# Allegro board AIRQUALITYBLUETOOTHSENSOR.brd
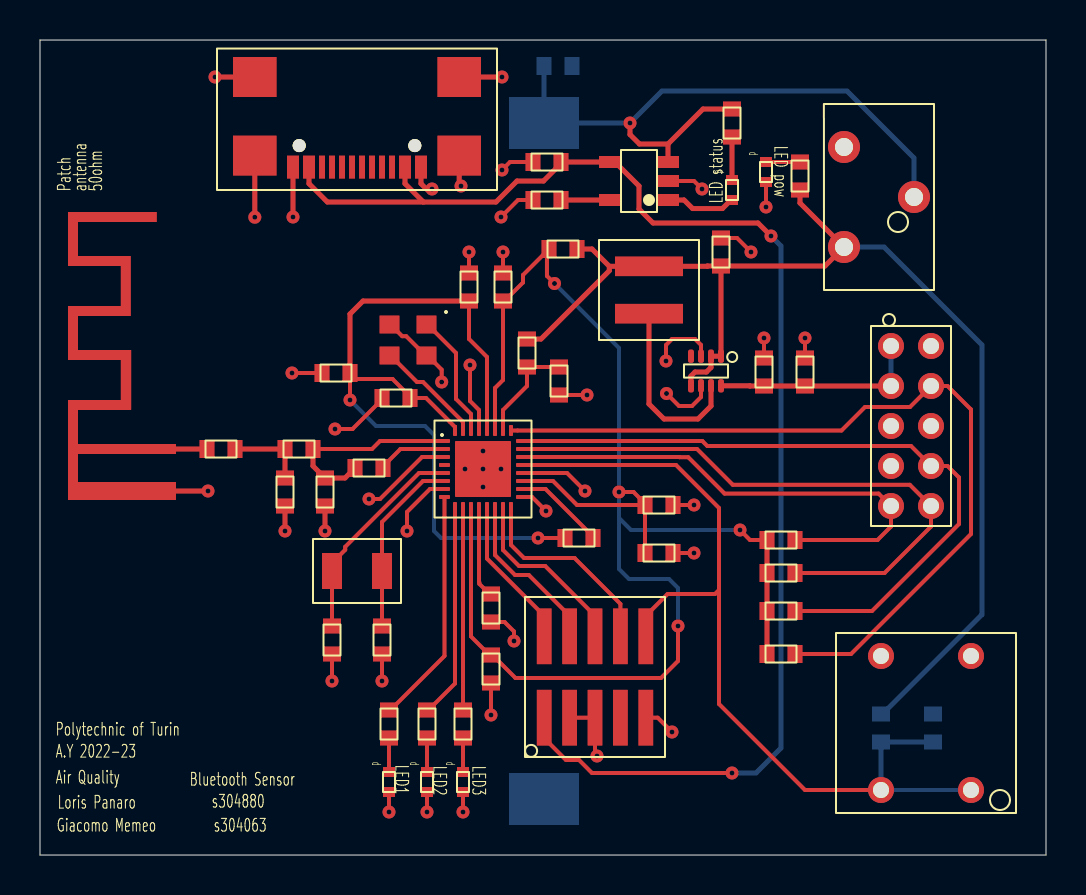
[diagram p0: board, top side]
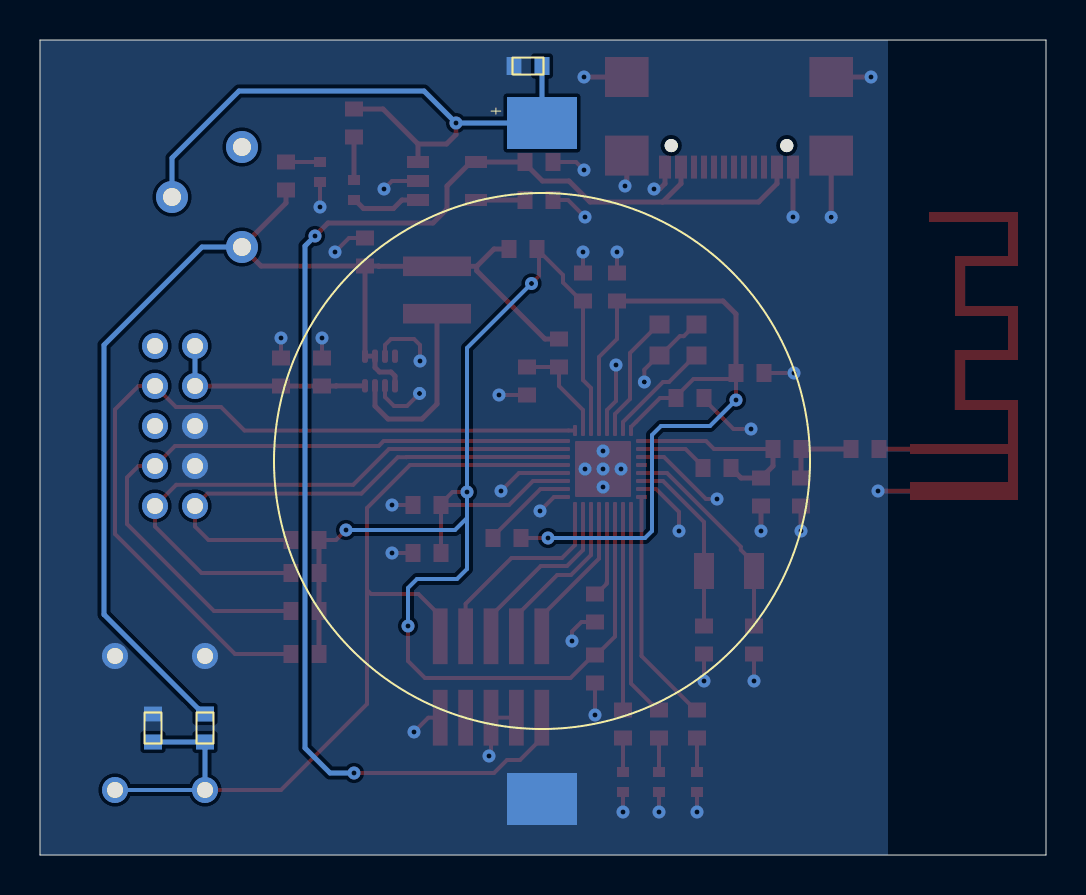
[diagram p1: board, bottom side, seen from below]

Outline 50.3 x 40.75 mm; copper layers: TOP, BOTTOM. Coordinates in mm from the lower left corner of the outline.
Outline path: 0,40.75 0,0 50.3,0 50.3,40.75 0,40.75

## Design rules (mm)
constraint set DEFAULT: min track width 0.127

## Placement (name value [footprint] x y rotation side)
C1  12pF  [0603C]  9.05 20.3 180 top
C2  1.2pF  [0603C]  14.25 18.15 90 top
C3  1.2pF  [0603C]  12.25 18.15 90 top
C4  1u  [0603C]  22.55 12.35 90 top
C5  12pF  [0603C]  14.6 10.75 90 top
C6  12pF  [0603C]  17.1 10.75 90 top
C7  47uF  [0603C]  38.25 24.15 270 top
C8  100nF  [0603C]  44.65 6.35 90 bottom
C9  5.6 uF  [0603C]  25.9 39.45 180 bottom
C10  10 uF  [0603C]  34.05 30.15 270 top
C11  22 uF  [0603C]  36.2 24.15 270 top
C12  5.6 uF  [0603C]  25.35 34.65 0 top
C13  100 nF  [0603C]  22.55 9.3 90 top
C14  100 nF  [0603C]  23.15 28.4 270 top
C15  10 uF  [0603C]  30.95 17.5 180 top
C16  100 nF  [0603C]  30.95 15.1 180 top
C17  10 uF  [0603C]  14.8 24.1 0 top
C18  100 nF  [0603C]  21.45 28.4 270 top
C19  100 nF  [0603C]  17.8 22.85 0 top
L1  15nH  [0603L]  16.45 19.35 180 top
L2  2nH  [0603L]  12.95 20.3 180 top
L3  1uH  [XGL4020]  30.45 28.25 270 top
L4  BLM18HE152SN1  [0603L]  26.15 30.3 180 top
L5  10 uH  [0603L]  26.95 15.85 180 top
R1  4.7k  [0603R]  17.45 6.55 90 top
R2  4.7k  [0603R]  19.35 6.55 90 top
R3  4.7k  [0603R]  21.15 6.55 90 top
R4  10k  [0603R]  37.05 15.75 180 top
R5  680k  [0603R]  24.35 25.1 90 top
R6  270k  [0603R]  25.95 23.7 90 top
R7  4.7k  [0603R]  38 33.95 270 top
R8  100k  [0603R]  42.05 6.35 270 bottom
R9  15 k  [0603R]  25.35 32.75 0 top
R10  470  [0603R]  34.6 36.6 90 top
RPU1  10k  [0603R]  37.05 14.1 0 top
RPU2  4.7k  [0603R]  37.05 12.2 0 top
RPU3  4.7k  [0603R]  37.05 10.05 180 top
U1  CC2640F128RSM  [MCU]  22.15 19.3 0 top
U2  an03  [PATCH_AN043]  6.3 17.75 90 top
U3  MCSJK-7E-24.00-8-10-60-B-10  [X24M]  18.4 25.75 180 top
U4  QTC332.76809B2R  [X32K]  15.85 14.2 0 top
U5  PMSA003I  [PM2_5]  43.55 21.45 270 top
U6  LED1  [SML]  17.45 3.65 90 top
U7  LED2  [SML]  19.35 3.65 90 top
U8  LED3  [SML]  21.15 3.65 90 top
U9  LPS-1301_9314_24  [LPS]  44.3 6.6 270 top
U10  FTSH-105-01-F-DV-K  [JTAG]  27.75 8.9 0 top
U11  LED_pow  [SML]  36.3 34.15 90 top
U12  SMTU2477N-LF  [LIR_NEW]  25.2 19.7 270 bottom
U13  -  [MCP73831]  29.95 33.7 90 top
U14  TPS61033  [TPS]  33.3 24.2 270 top
U15  USB4110-GF-A  [USB]  15.85 41.75 180 top
U16  LED_status  [SML]  34.6 33.25 90 top
U17  M12  [MS12]  41.95 32.9 270 top

## Library data of the parts
C1-C19 = C
L1-L5 = L
R1-R10 RPU1-RPU3 = R
U1 = CC2460F128RSM
U2 = ANTENNA
U3 = MCSJK-7E-24.00-8-10-60-B-10
U4 = QTC33276809B2R_0
U5 = PMSA003I
U6-U8 U11 U16 = SML-P11
U9 = LPS-1301_9314_24
U10 = FTSH-105-01-F-DV-K
U12 = SMTU2477N-LF
U13 = MCP73831_0
U14 = TPS61033_1
U15 = USB4110-GF-A
U17 = M12

## Footprints (pads in the part's own frame, mm; a bottom-side part is the same pattern mirrored in y, then rotated)
0603C
  rect 0.75x0.9 smd: 1(-0.7,0) 2(0.7,0)
0603L
  rect 0.75x0.9 smd: 1(-0.7,0) 2(0.7,0)
0603R
  rect 0.75x0.9 smd: 1(-0.7,0) 2(0.7,0)
JTAG
  rect 0.74x2.79 smd: 1(-2.54,-2.035) 2(-2.54,2.035) 3(-1.27,-2.035) 4(-1.27,2.035) 5(0,-2.035) 6(0,2.035) 7(1.27,-2.035) 8(1.27,2.035) 9(2.54,-2.035) 10(2.54,2.035)
LIR_NEW
  rect 2.6x3.5 smd: 1(-16.9,0) 2(16.9,0)
LPS
  round 1.3 hole 0.8: 1(3.35,2.25) 2(3.35,-2.25) 3(-3.35,2.25) 4(-3.35,-2.25)
MCP73831
  rect 0.6x1.1 smd: 1(-0.95,-1.45) 2(0,-1.45) 3(0.95,-1.45) 4(0.95,1.45) 5(-0.95,1.45)
MCU
  rrect 0.55x0.2 smd: 1(-1.925,1.4) 2(-1.925,1) 3(-1.925,0.6) 4(-1.925,0.2) 5(-1.925,-0.2) 6(-1.925,-0.6) 7(-1.925,-1) 8(-1.925,-1.4) 17(1.925,-1.4) 18(1.925,-1) 19(1.925,-0.6) 20(1.925,-0.2) 21(1.925,0.2) 22(1.925,0.6) 23(1.925,1) 24(1.925,1.4)
  rrect 0.2x0.55 smd: 9(-1.4,-1.925) 10(-1,-1.925) 11(-0.6,-1.925) 12(-0.2,-1.925) 13(0.2,-1.925) 14(0.6,-1.925) 15(1,-1.925) 16(1.4,-1.925) 25(1.4,1.925) 26(1,1.925) 27(0.6,1.925) 28(0.2,1.925) 29(-0.2,1.925) 30(-0.6,1.925) 31(-1,1.925) 32(-1.4,1.925)
  rrect 2.8x2.8 smd: 33(0,0)
MS12
  round 1.6 hole 0.9: 1(2.5,-1.75) 2(-2.5,-1.75) 3(0,1.75)
PATCH_AN043
  rect 0.9x0.5 smd: 1(0.45,-0.25)
  rect 0.5x0.5 smd: 2(2.55,-0.25)
PM2_5
  round 1.3 hole 0.8: 1(-4,-1) 2(-2,-1) 3(0,-1) 4(2,-1) 5(4,-1) 6(-4,1) 7(-2,1) 8(0,1) 9(2,1) 10(4,1)
SML
  rect 0.5x0.6 smd: 1(0.5,0) 2(-0.5,0)
TPS
  rrect 0.67x0.3 smd: 1(-0.74,0.75) 2(-0.74,0.25) 3(-0.74,-0.25) 4(-0.74,-0.75) 5(0.74,-0.75) 6(0.74,-0.25) 7(0.74,0.25) 8(0.74,0.75)
USB
  round 0.65 hole 0.65: (-2.89,6.28) (2.89,6.28)
  rect 0.6x1.15 smd: 1(-3.2,7.355) 2(-2.4,7.355) 11(2.4,7.355) 12(3.2,7.355)
  rect 0.3x1.15 smd: 3(-1.75,7.355) 4(-1.25,7.355) 5(-0.75,7.355) 6(-0.25,7.355) 7(0.25,7.355) 8(0.75,7.355) 9(1.25,7.355) 10(1.75,7.355)
  rect 2.18x2 smd: 13(-5.11,6.78) 14(5.11,6.78) 15(-5.11,2.85) 16(5.11,2.85)
X24M
  rect 1x0.9 smd: 1(-0.925,-0.775) 2(0.925,-0.775) 3(0.925,0.775) 4(-0.925,0.775)
X32K
  rect 1x1.8 smd: 1(-1.25,0) 2(1.25,0)
XGL4020
  rect 0.98x3.4 smd: 1(-1.185,0) 2(1.185,0)

## Nets
GND_A: C2.1 C3.1 C4.1 C5.1 C6.1 C7.1 C8.2 C9.1 C10.1 C11.1 C12.1 C13.1 C14.1 C15.1 C16.1 C17.1 C18.1 C19.1 R6.1 R9.1 U1.3 U1.7 U1.17 U1.20 U1.29 U1.33 U2.1 U3.2 U3.4 U5.3 U5.4 U6.2(\\) U7.2(\\) U8.2(\\) U9.3 U9.4 U10.3 U10.5 U10.9 U11.2(\\) U12.2 U13.2(VSS) U14.3 U14.6 U15.1 U15.12 U15.13 U15.14 U15.15 U15.16
VBAT: C9.2 R10.2 U12.1(VDD) U13.3 U17.3
VCC: C10.2 L3.1 L4.1 R5.2 R7.2 R8.1 U14.1 U14.2 U14.5 U17.1(VBAT_OUT)
VCC_SENSOR: C7.2 C11.2 U5.1 U5.2(VCC#2) U14.8(VOUT)
VDDR: C17.2 C18.2 C19.2 L5.2 U1.28 U1.32
VDDS: C13.2 C14.2 C15.2 C16.2 L4.2 R4.2 RPU1.1 RPU2.1 RPU3.2 U1.11 U1.19 U1.27
DC-DC_SW_OUT: L5.1 U1.18
LED1: R1.1 U6.1
LED2: R2.1 U7.1
LED3: R3.1 U8.1
RF_FILTER: C1.1 C3.2 L2.2
RF_FRONTEND: C1.2 U2.2(IN)
RST_N: C8.1 R8.2 U1.21 U9.1 U9.2(VDD2) U10.10
RST_SENSOR: R4.1 U1.22 U5.5
SCL: RPU3.1 U1.25 U5.7
SDA: RPU2.2 U1.24 U5.9
SET: RPU1.2 U1.23 U5.10
STAT: U13.1 U16.2(\\)
SW_TO_L: L3.2 U14.7
TCKC_JTAG: U1.14 U10.4
TDI_JTAG: U1.16 U10.8
TDO_JTAG: U1.15 U10.6
TMSC_JTAG: U1.13 U10.2
TO_ADC: R5.1 R6.2 U1.26
TO_LED1: R1.2 U1.8
TO_LED2: R2.2 U1.9
TO_LED3: R3.2 U1.10
TO_LED_POW: R7.1 U11.1
TO_LED_STATUS: R10.1 U16.1
TO_RFN: L1.1 U1.2
TO_RFP: C2.2 L1.2 L2.1 U1.1
TO_X24N: U1.30 U3.1
TO_X24P: U1.31 U3.3(X24M_P)
TO_X32Q1: C5.2 U1.5 U4.1
TO_X32Q2: C6.2 U1.6(X32K_Q2) U4.2(Q2)
VUSB: C12.2 U10.1(VCC) U13.4 U15.2(VBUS#2) U15.11
N11141: R9.2 U13.5
N19424: C4.2 U1.12

Pads without a net: U1 4; U5 6 8; U10 7; U14 4; U15 3 4 5 6 7 8 9 10; U17 2

## Via types
v1: diameter 0.65, hole 0.25, TOP to BOTTOM, 54 vias

## Routing (per net, layer and track width the routed paths; a pad name or vN(x,y) marks a point on that pad's centre or on a via; arc(x,y) is an arc through that point)
GND_A: length 78.5
  TOP w0.2: v1(31.33,23.08) 31.95,22.45 32.6,22.45 33.05,22.9 U14.6 ; v1(31.3,24.7) 31.3,25.5 31.6,25.8 32.75,25.8 33.05,25.5 U14.3 ; v1(27.85,4.95) 27.75,5.05 U10.5 U10.3 ; U1.7 19.5,18.3 18.35,17.15 v1(18.35,16.2) ; C6.1 v1(17.1,8.7) ; C11.1 v1(36.2,25.85) ; v1(33.1,33.3) 32.7,33.7 U13.2 ; C16.1 v1(32.7,15.1) ; C18.1 v1(21.45,30.15) ; U1.29 21.95,22.25 21.5,22.7 v1(21.5,24.5) ; U1.17 24.6,17.9 v1(25.3,17.2) ; C17.1 v1(12.6,24.1) ; v1(23.1,34.25) 23.5,34.65 C12.1 ; C5.1 v1(14.6,8.7) ; C4.1 23.23,11.65 23.7,11.18 v1(23.7,10.7) ; C10.1 34.85,30.85 v1(35.55,30.15) ; v1(36.3,32.4) U11.2 ; U10.9 30.89,6.87 v1(31.6,6.15) ; C15.1 v1(32.7,17.5) ; C7.1 v1(38.25,25.85) ; v1(20.08,23.65) 20.08,24.27 19.38,24.98 U3.4 19.28,24.98 18.31,25.94 18.11,25.94 17.53,26.53 U3.2 ; U8.2 v1(21.15,2.15) ; R9.1 23.9,32.75 v1(23.05,31.9) ; U6.2 v1(17.45,2.15) ; C14.1 v1(23.15,30.15) ; C19.1 17.1,22.78 15.63,21.3 v1(14.75,21.3) ; U7.2 v1(19.35,2.15) ; U1.20 26.35,19.1 v1(27.25,18.2) ; v1(16.45,17.8) 17,17.8 19.1,19.9 U1.3 ; C13.1 v1(22.55,7) ; R6.1 v1(27.35,23)
  TOP w0.25: U15.1 19.05,33.57 19.32,33.3 v1(19.6,33.3) ; v1(21.05,33.45) 20.96,33.54 U15.13 ; C3.1 v1(12.25,16.2) ; U15.14 v1(10.74,31.89) ; U15.12 v1(12.65,31.9) ; U15.15 v1(23.1,38.9) ; U15.16 v1(8.75,38.9) ; C2.1 v1(14.25,16.2) ; U2.1 v1(8.4,18.2)
  vias: v1(21.25,19.3) v1(22.15,20.2) v1(22.15,19.3) v1(22.15,18.4) v1(23.05,19.3)
VBAT: length 32.8
  TOP w0.25: v1(29.5,36.6) 29.5,36.02 29.97,35.55 31.4,35.55 ; 31.4,35.55 33.15,37.3 R10.2 ; 31.4,35.55 U13.3
  BOTTOM w0.25: U17.3 43.7,34.85 40.35,38.2 31.1,38.2 v1(29.5,36.6) U12.1 C9.2
VCC: length 60.4
  TOP w0.25: C10.2 39.25,29.45 U17.1 38,32.6 R7.2 ; C10.2 33.37,29.45 33.36,29.44 L3.1 28.47,29.44 ; C10.2 U14.1 U14.2 33.55,24.38 33.32,24.15 32.75,24.15 32.55,23.95 U14.5 ; 28.47,29.44 27.6,30.3 L4.1 ; 28.47,29.44 28.47,29.21 25.05,25.8 R5.2
  BOTTOM w0.25: R8.1 42.12,7.05 47.1,12.03 47.1,25.5 42.2,30.4 U17.1
VCC_SENSOR: length 10.5
  TOP w0.25: U14.8 35.49,23.46 35.5,23.45 C11.2 C7.2 U5.2
  BOTTOM w0.25: U5.2 U5.1
VDDR: length 40.3
  TOP w0.2: U1.32 20.75,21.4 20.49,21.66 19.3,22.85 C19.2 18.5,22.93 17.62,23.8 15.73,23.8 15.5,24.03 ; L5.2 v1(24.9,15.85) ; C17.2 15.5,24.03 ; 15.5,24.03 v1(15.5,22.75) ; U1.28 22.35,24.9 21.45,25.8 C18.2
  TOP w0.25: C17.2 15.5,27.05 16.15,27.7 C18.2
  BOTTOM w0.2: v1(15.5,22.75) 16.8,21.45 19.25,21.45 19.7,21 19.7,16.2 20.05,15.85 v1(24.9,15.85)
VDDS: length 77.4
  TOP w0.2: 22.75,21.75 U1.27 22.75,21.75 ; 22.75,21.75 22.75,23.35 23.15,23.75 C14.2 23.23,27.7 24.15,28.62 24.15,29 25.27,30.12 25.35,30.12 ; U1.19 25.65,18.7 26.85,17.5 C15.2 ; L4.2 25.35,30.2 25.35,30.12 ; v1(35,16.25) 35.5,15.75 R4.2 ; C15.2 30.25,17.58 29.68,18.15 v1(28.95,18.15) ; C15.2 C16.2 ; 25.35,30.12 25.35,28.95 v1(25.73,28.58) ; v1(31.9,11.45) 31.9,9.7 31.05,8.85 23.78,8.85 22.62,10 C13.2 22.48,10 21.55,10.93 U1.11
  TOP w0.25: R4.2 RPU1.1 RPU2.1 RPU3.2
  BOTTOM w0.2: v1(35,16.25) 29.55,16.25 28.95,16.85 ; 28.95,16.85 v1(28.95,18.15) 28.95,25.35 v1(25.73,28.58) ; 28.95,16.85 28.95,14.3 29.45,13.8 31.45,13.8 31.9,13.35 v1(31.9,11.45)
DC-DC_SW_OUT: length 4.6
  TOP w0.2: U1.18 25.28,18.3 27.65,15.93 L5.1
LED1: length 1.7
  TOP w0.2: U6.1 R1.1
LED2: length 1.7
  TOP w0.2: U7.1 R2.1
LED3: length 1.7
  TOP w0.2: U8.1 R3.1
RF_FILTER: length 4
  TOP w0.25: C3.2 L2.2 C1.1
RF_FRONTEND: length 1.8
  TOP w0.25: U2.2 C1.2
RST_N: length 45.2
  TOP w0.2: 33.95,13.25 33.95,7.55 38.25,3.25 U9.2 ; 33.95,13.25 33.95,17.35 31.8,19.5 U1.21 ; 33.95,13.25 33.75,13.05 31.38,13.05 30.29,11.96 U10.10
  BOTTOM w0.2: U9.1 U9.2
  BOTTOM w0.25: C8.1 R8.2 U9.2
RST_SENSOR: length 25.6
  TOP w0.2: R4.1 41.88,15.75 42.55,16.42 U5.5 41.93,18.07 34.23,18.07 32.41,19.89 31.98,19.89 31.97,19.9 U1.22
SCL: length 41.9
  TOP w0.2: RPU3.1 40.55,10.05 46.55,16.05 46.55,22.28 45.38,23.45 U5.7 43.5,22.4 41.25,22.4 40.07,21.22 23.88,21.22 U1.25
SDA: length 35
  TOP w0.2: RPU2.2 41.6,12.2 45.95,16.55 45.95,18.88 45.38,19.45 U5.9 43.55,20.45 33.37,20.45 33.12,20.7 U1.24
SET: length 30.4
  TOP w0.2: RPU1.2 42.23,14.1 44.55,16.42 U5.10 43.49,18.51 34.64,18.51 32.85,20.3 U1.23
STAT: length 3.6
  TOP w0.25: U16.2 34.55,32.75 34.12,32.32 32.63,32.32 32.2,32.75 U13.1
SW_TO_L: length 9.2
  TOP w0.25: U14.7 33.55,22.45 32.9,21.8 31.2,21.8 30.45,22.55 L3.2
TCKC_JTAG: length 8.4
  TOP w0.2: U10.4 26.48,11.96 24.44,14 23.75,14 22.75,15 22.75,15.08 22.75,15.08 U1.14
TDI_JTAG: length 10.2
  TOP w0.2: U1.16 23.55,15.5 24.2,14.85 26.73,14.85 29.02,12.56 U10.8
TDO_JTAG: length 9.1
  TOP w0.2: U1.15 23.15,15.25 23.95,14.45 25.26,14.45 27.75,11.96 U10.6
TMSC_JTAG: length 7.6
  TOP w0.2: U1.13 22.35,14.92 22.35,14.92 22.35,14.82 25.21,11.96 U10.2
TO_ADC: length 5.3
  TOP w0.2: U1.26 23.15,21.73 23.15,21.73 23.15,22.25 24.35,23.45 R5.1 R6.2
TO_LED1: length 11.8
  TOP w0.2: U1.8 20.23,9.95 17.53,7.25 R1.2
TO_LED2: length 10.7
  TOP w0.2: U1.9 20.75,8.58 19.43,7.25 R2.2
TO_LED3: length 10.1
  TOP w0.2: R3.2 U1.10
TO_LED_POW: length 1.7
  TOP w0.2: U11.1 R7.1
TO_LED_STATUS: length 2.2
  TOP w0.25: R10.1 U16.1
TO_RFN: length 3.5
  TOP w0.2: L1.1 17.15,19.43 18.03,20.3 U1.2
TO_RFP: length 10.1
  TOP w0.2: U1.1 17,20.7 16.6,20.3 L2.1
  TOP w0.25: L2.1 13.65,19.45 C2.2 15.25,18.85 L1.2
TO_X24N: length 6.3
  TOP w0.2: U1.30 21.55,22.05 20.8,22.8 20.8,25.1 19.38,26.53 U3.1
TO_X24P: length 5.5
  TOP w0.2: U1.31 21.15,21.65 19.15,23.65 18.85,23.65 17.53,24.98 U3.3
TO_X32Q1: length 10.7
  TOP w0.2: U1.5 18.95,19.1 15.26,15.41 15.26,15.26 14.6,14.6 U4.1 C5.2
TO_X32Q2: length 9.2
  TOP w0.2: C6.2 U4.2 17.1,16.65 19.15,18.7 U1.6
VUSB: length 69.4
  TOP w0.2: v1(34.6,4.1) 27.6,4.1 26.95,4.75 26.3,4.75 25.21,5.84 U10.1
  TOP w0.25: 19.17,32.65 18.25,33.57 U15.2 ; 19.17,32.65 22.8,32.65 23.85,33.7 25.18,33.7 26.05,34.58 C12.2 U13.4 28.75,34.65 29.95,33.45 29.95,32.3 30.65,31.6 35.9,31.6 v1(36.55,30.95) ; 19.17,32.65 14.37,32.65 13.45,33.57 U15.11
  BOTTOM w0.25: v1(36.55,30.95) 37.05,30.45 37.05,5.35 35.8,4.1 v1(34.6,4.1)
N11141: length 2.5
  TOP w0.25: R9.2 U13.5
N19424: length 4.6
  TOP w0.2: U1.12 21.95,14.75 21.95,14.75 21.95,13.65 21.97,13.63 21.97,13.56 22.48,13.05 C4.2

## Copper pours and planes (outline as drawn; the poured copper is in the pictures)
GND_A on BOTTOM: 7.9,40.75 7.9,0 50.3,0 50.3,40.75
RF_FRONTEND on TOP (solid shape): 5.84,31.65 1.9,31.65 1.9,29.95 4.54,29.95 4.54,26.95 1.9,26.95 1.9,25.25 4.56,25.25 4.56,22.27 4.54,22.25 1.9,22.25 1.9,20.55 6.3,20.55 6.3,20.05 1.9,20.05 1.9,18.65 6.3,18.65 6.3,17.75 1.4,17.75 1.4,22.75 4.04,22.75 4.04,24.75 1.4,24.75 1.4,27.45 4.04,27.45 4.04,29.45 1.4,29.45 1.4,32.15 5.84,32.15

## Text on the board
Ref Des/Silkscreen Top: Polytechnic of Turin | A.Y 2022-23 | Air Quality | Giacomo Memeo | Loris Panaro | Bluetooth Sensor | s304880 | s304063 | LED status | LED1 | LED2 | LED3 | LED pow
